# Altium PCB air.PcbDoc
Units mm, origin at the board's own origin, x right, y up, seen from the top; angles counter-clockwise.
Board outline 49.02 x 48.89 mm, 2 copper layers (Top Layer, Bottom Layer); 23 components, 26 nets, 115 pads, 28 vias.
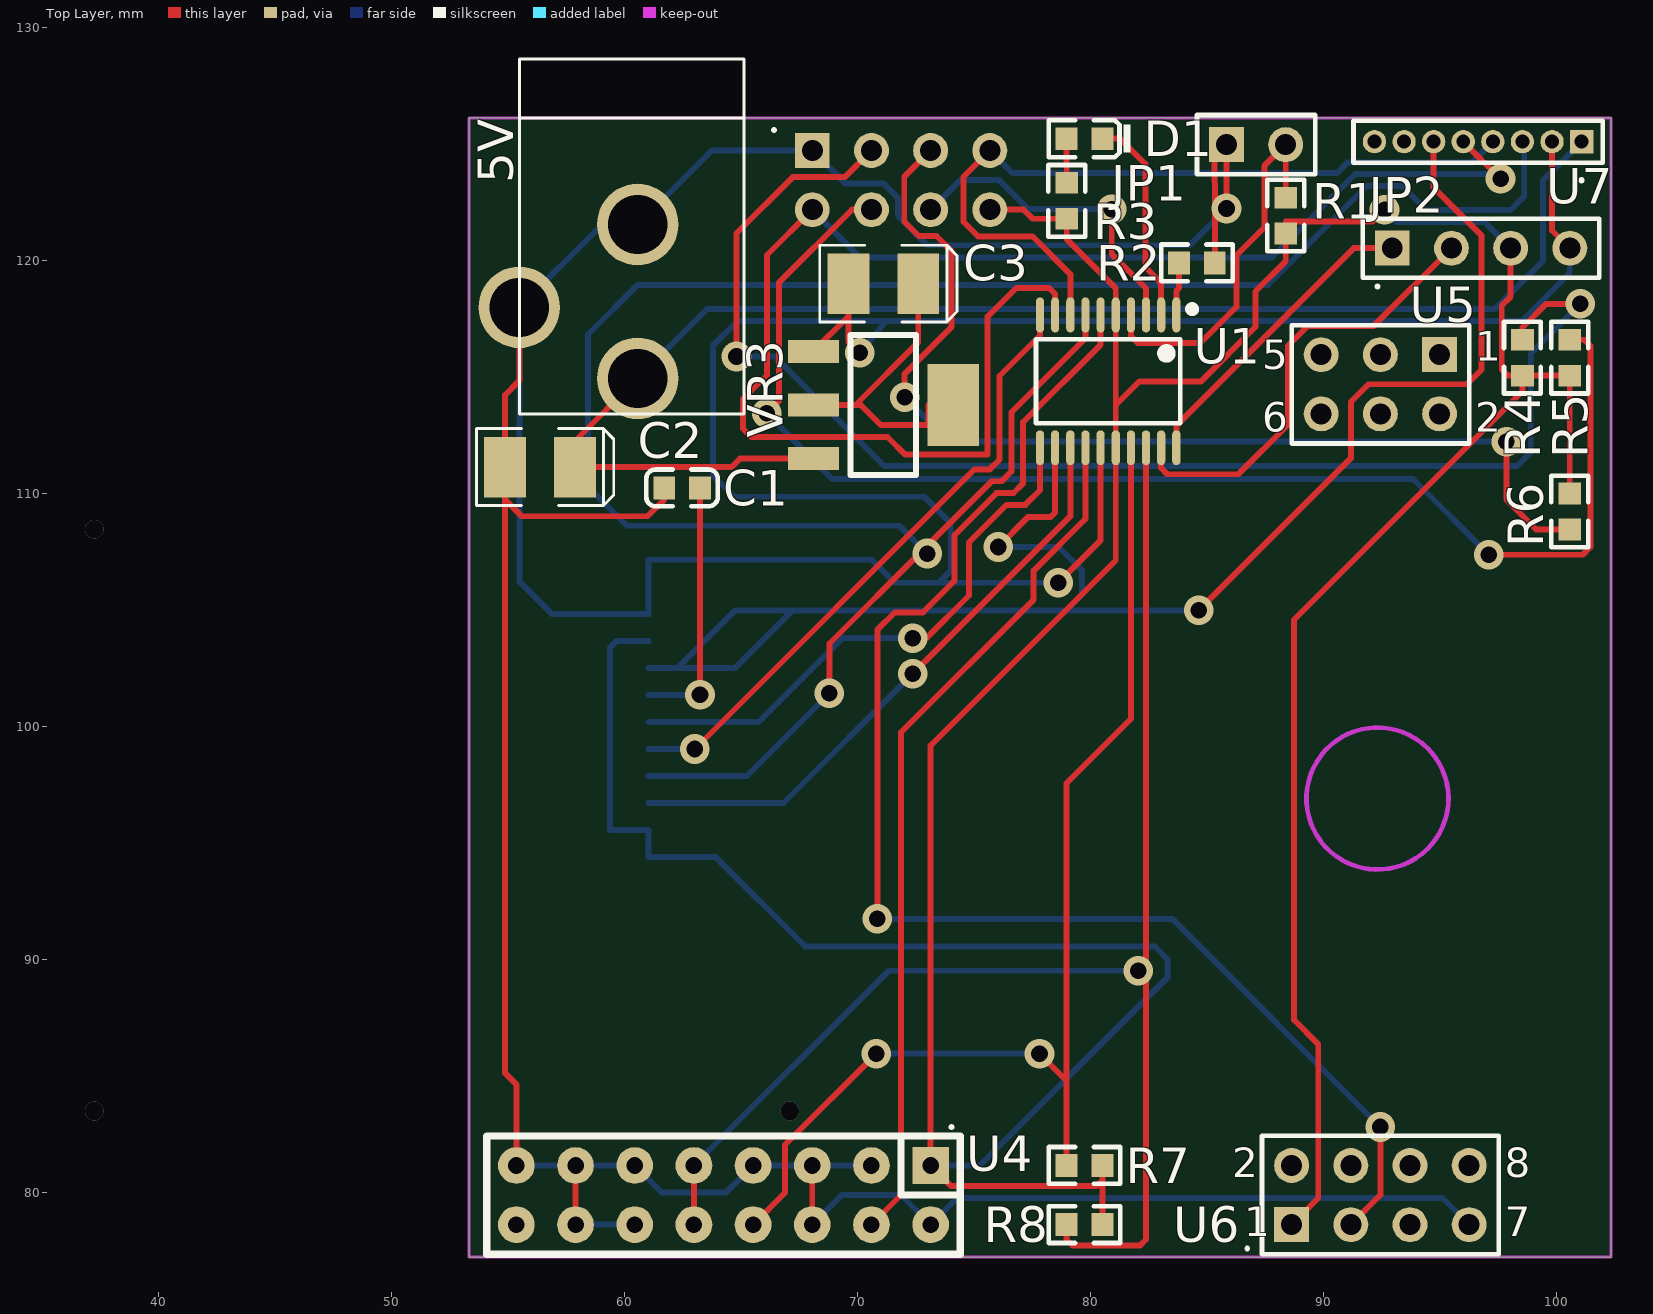
[diagram p0: Top Layer view]
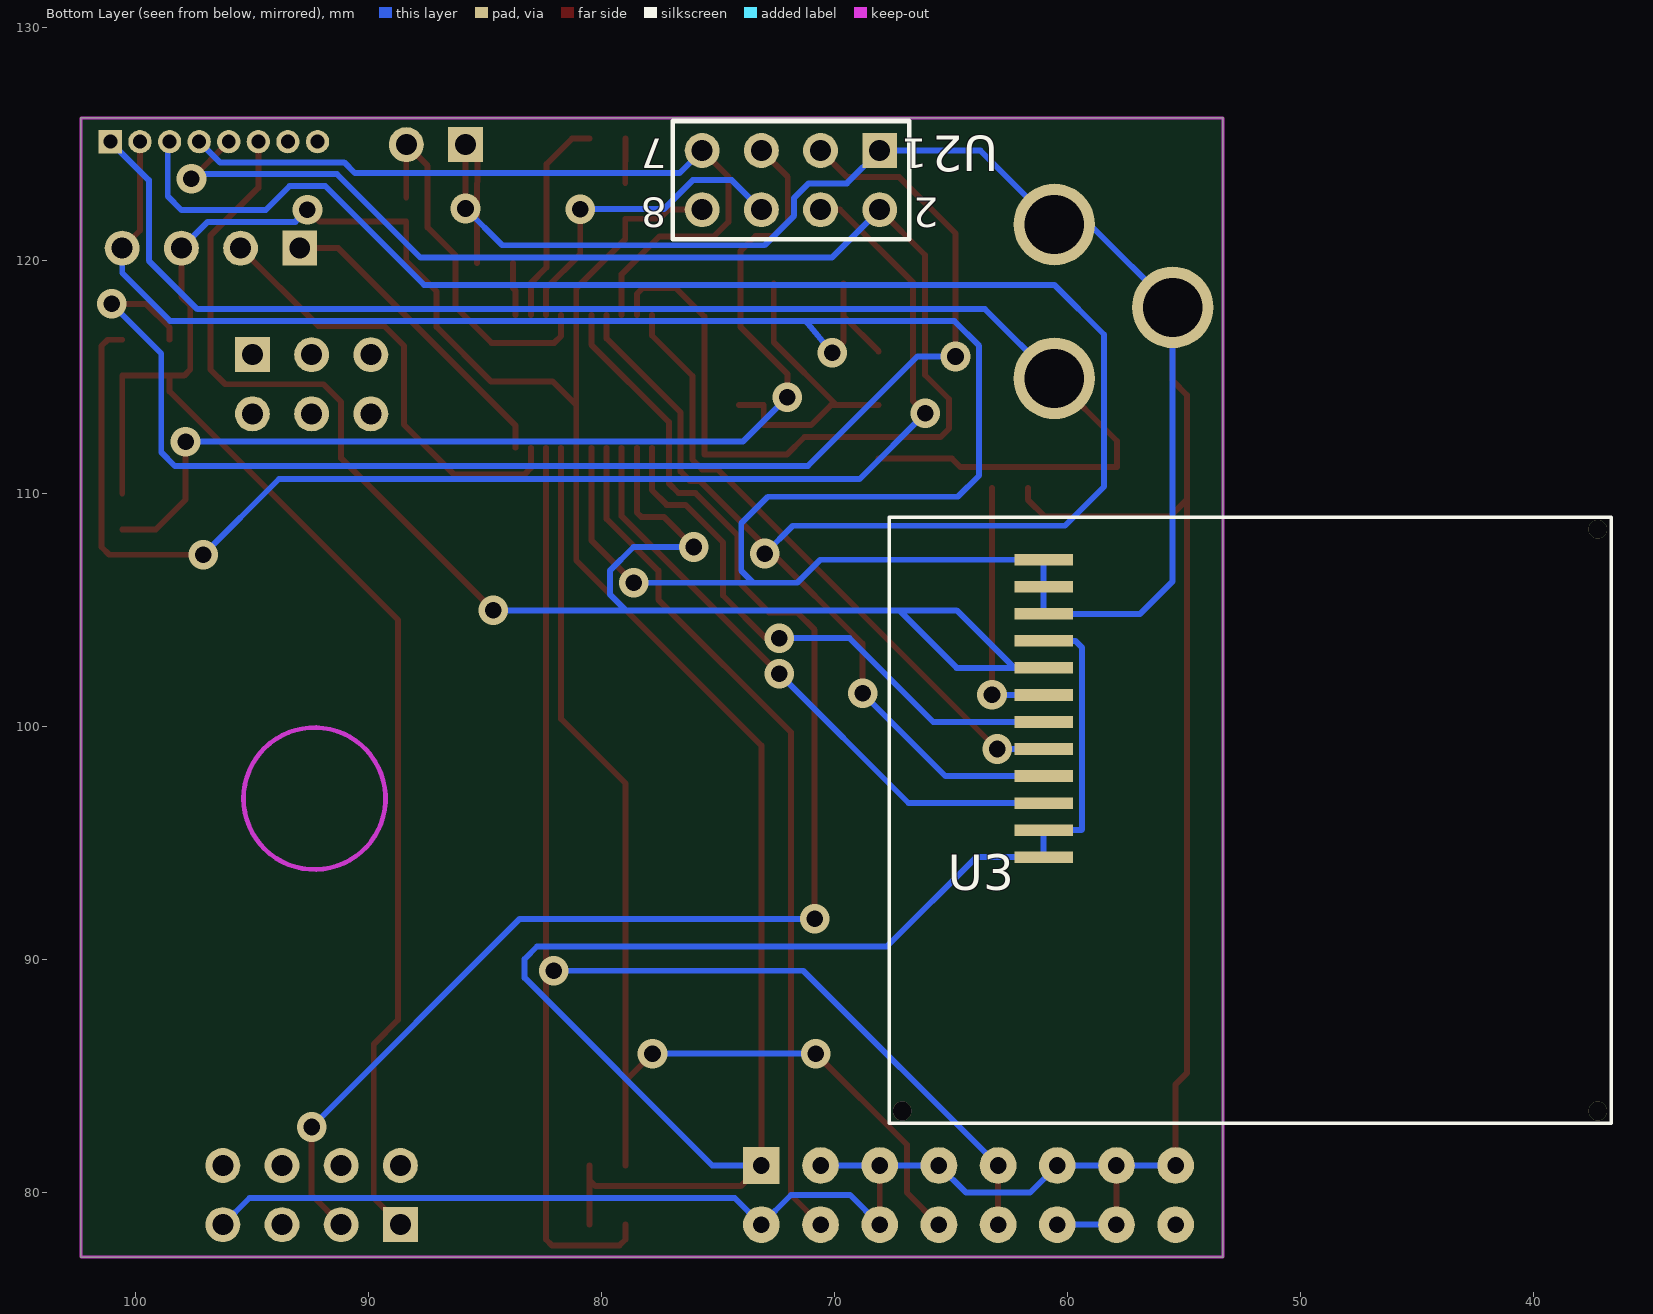
[diagram p1: Bottom Layer view, seen from below]

## Layer stack, top to bottom
Top Layer: signal copper 0.0356
Dielectric: dielectric 0.32, FR-4, Dk 4.8
Bottom Layer: signal copper 0.0356

## Board outline
53.34,77.216 53.34,126.111 102.362,126.111 102.362,77.216

## Design rules (kind name [scope] priority, off if disabled: settings)
Clearance [All] p1: gap=0.254
ComponentClearance [All] p1: gap=0.254 collisioncheckmode=3 verticalgap=0.254
PolygonConnect [All] p1: connectstyle=Relief reliefconductorwidth=0.254 reliefentries=4 polygonreliefangle="90 Angle"
RoutingVias [All] p1: holewidth=0.711 width=1.27 viastyle="Through Hole" minholewidth=0.711 minwidth=1.27 maxholewidth=0.711 maxwidth=1.27
SolderMaskExpansion [All] p1: expansion=0.102
TestPointUsage [All] p1: valid=0 allowmultiple=FALSE
Testpoint [All] p1: side=15 testpointundercomponent=TRUE minsize=1.016 maxsize=2.54 preferedsize=1.524 minholesize=0 maxholesize=1.016 preferedholesize=0.813 testpointgrid=0.025 style=1023 order=0-112345678
Width [All] p1: maxlimit=0.254 minlimit=0.254 preferedwidth=0.254
18 further rules are at their usual default settings.

## Classes and differential pairs
net class CPU[0..1]: CPU0 CPU1
net class LCD[0..1]: LCD0 LCD1
net class OTHER[0..1]: OTHER0 OTHER1
net class POWER[0..1]: POWER0 POWER1
net class SENSOR[0..1]: SENSOR0 SENSOR1
net class WIFI[0..1]: WIFI0 WIFI1

## Components (designator, comment, footprint, x,y, rotation, side; value= is the part's Value field where it differs from the comment)
5V "Header 3" POWER-B 60.579,118.491 r0 top locked (schematic designator POWER)
C1 "Cap Semi" LC-0603_C 62.484,110.236 r180 top locked
C2 "47u/16V" LC-CASE-B_3528 56.388,111.125 r0 top locked
C3 "10u" LC-CASE-B_3528 71.12,118.999 r0 top locked
D1 "LED" LC-0603_LED_S1 79.756,125.222 r180 top locked
JP1 "JUMPER" HDR1X2 85.852,124.968 r0 top locked
JP2 "ST-LINK V2" HDR1x4 92.964,120.523 r0 top locked
R1 "Res3" LC-0603_R 88.392,121.92 r270 top locked
R2 "Res3" LC-0603_R 84.582,119.888 r0 top locked
R3 "Res3" LC-0603_R 78.994,122.555 r270 top locked
R4 "Res3" LC-0603_R 98.552,115.824 r270 top locked
R5 "Res3" LC-0603_R 100.584,115.824 r270 top locked
R6 "Res3" LC-0603_R 100.584,109.22 r90 top locked
R7 "Res3" LC-0603_R 79.756,81.153 r0 top locked
R8 "Res3" LC-0603_R 79.756,78.613 r0 top locked
U1 "stm32f030f4p6" LC-TSSOP-20 80.772,114.808 r180 top locked
U2 "ESP8266" HDR2X4 68.072,124.714 r0 bottom locked
U3 "ST7585" ST7585 67.691,108.966 r270 bottom locked
U4 "LM096" IDC16 73.152,81.153 r180 top locked
U5 "RUISHI" HDR2X3 94.996,115.951 r180 top locked
U6 "RUISHI" HDR2X4 88.646,78.613 r0 top locked
U7 "PM2.5" MHDR1x8 101.092,125.095 r180 top locked
VR3 "AP1117E33L" LC-SOT-223 71.12,113.792 r180 top locked

## Footprints (in the part's own frame and the unit in brackets; to place one, negate y for a bottom-side part, rotate by r counter-clockwise, add the part's x,y. Pads: shape width x height; smd on the part's side, far side on the other; paste and mask are expansions set on the pad)
HDR1X2 [mm] "Connector; Header; 2 Position"
  rect 1.5x1.5 hole 0.9: 1(0,0)
  round 1.5 hole 0.9: 2(2.54,0)
  silkscreen extent -1.27,-1.27 3.81,1.27
HDR1x4 [mm] "Connector; Header; 4 Position"
  rect 1.5x1.5 hole 0.9: 1(0,0)
  round 1.5 hole 0.9: 2(2.54,0) 3(5.08,0) 4(7.62,0)
  silkscreen extent -1.27,-1.27 8.89,1.27
HDR2X3 [mm] "Connector; Header; 3x2 Position"
  rect 1.5x1.5 hole 0.9: 1(0,0)
  round 1.5 hole 0.9: 2(0,2.54) 3(2.54,0) 4(2.54,2.54) 5(5.08,0) 6(5.08,2.54)
  silkscreen extent -1.27,-1.27 6.35,3.81
HDR2X4 [mm] "Connector; Header; 4x2 Position"
  rect 1.5x1.5 hole 0.9: 1(0,0)
  round 1.5 hole 0.9: 2(0,2.54) 3(2.54,0) 4(2.54,2.54) 5(5.08,0) 6(5.08,2.54) 7(7.62,0) 8(7.62,2.54)
  silkscreen extent -1.27,-1.27 8.89,3.81
IDC16 [mil]
  rect 62x62 hole 28: 1(0,0)
  round 62 hole 28: 2(0,100) 3(100,0) 4(100,100) 5(200,0) 6(200,100) 7(300,0) 8(300,100) 9(400,0) 10(400,100) 11(500,0) 12(500,100) 13(600,0) 14(600,100) 15(700,0) 16(700,100)
  silkscreen extent -50,-50 750,150
LC-0603_C [mm]
  rect 0.93x0.98 smd: 1(-0.77,0) 2(0.77,0)
  silkscreen extent -1.54,-0.79 1.54,0.79, body extent -0.8,-0.4 0.8,0.4, height 0.3
LC-0603_LED_S1 [mm]
  rect 0.93x0.98 smd: A(0.77,0) K(-0.77,0)
  silkscreen extent -1.98,-0.79 1.54,0.79, body extent -0.8,-0.4 0.8,0.4, height 0.6
LC-0603_R [mm]
  rect 0.93x0.98 smd: 1(-0.77,0) 2(0.77,0)
  silkscreen extent -1.54,-0.79 1.54,0.79, body extent -0.85,-0.4 0.85,0.4, height 0.56
LC-CASE-B_3528 [mm]
  rect 1.8x2.6 smd: 1(1.5,0) 2(-1.5,0)
  silkscreen extent -2.73,-1.65 3.16,1.65, body extent -1.85,-1.47 1.85,1.46, height 2.03
LC-SOT-223 [mm]
  rect 2.2x1 smd: 1(3,-2.3) 2(3,0) 3(3,2.3)
  rect 2.2x3.5 smd: 2(-3,0)
  silkscreen extent -1.4,-3 1.4,3, body extent -3.49,-3.24 3.49,3.24, height 1.64
LC-TSSOP-20 [mm]
  oval 0.35x1.5 smd: 1(-2.925,-2.85) 2(-2.275,-2.85) 3(-1.625,-2.85) 4(-0.975,-2.85) 5(-0.325,-2.85) 6(0.325,-2.85) 7(0.975,-2.85) 8(1.625,-2.85) 9(2.275,-2.85) 10(2.925,-2.85) 11(2.925,2.85) 12(2.275,2.85) 13(1.625,2.85) 14(0.975,2.85) 15(0.325,2.85) 16(-0.325,2.85) 17(-0.975,2.85) 18(-1.625,2.85) 19(-2.275,2.85) 20(-2.925,2.85)
  silkscreen extent -3.75,-3.25 3.1,1.8
MHDR1x8 [mm] "Connector; Header; 8 Position"
  rect 1x1 hole 0.6: 1(0,0)
  round 1 hole 0.6: 2(1.27,0) 3(2.54,0) 4(3.81,0) 5(5.08,0) 6(6.35,0) 7(7.62,0) 8(8.89,0)
  silkscreen extent -0.9,-0.9 9.79,0.9
POWER-B [mm]
  round 3.5 hole 2.54: 1(0,-3.556) 2(0,3.048) 3(-5.08,-0.508)
  silkscreen extent -5.08,-5.08 4.57,10.16
ST7585 [mm] "96X48 LCD"
  rect 0.5x2.5 smd: 1(14.58,6.655) 2(13.419,6.655) 3(12.259,6.655) 4(11.099,6.655) 5(9.939,6.655) 6(8.779,6.655) 7(7.618,6.655) 8(6.458,6.655) 9(5.298,6.655) 10(4.138,6.655) 11(2.977,6.655) 12(1.817,6.655)
  silkscreen extent 0,0.03 26.01,31.01

## Part data
5V: "Header, 3-Pin"
C1: "Capacitor (Semiconductor SIM Model)"
C2 C3: library part ELECTRO2
JP1: "Jumper"
JP2: library part "4 HEADER", "4 Pin Header"
R1 R2 R3 R4 R5 R6 R7 R8: "Resistor"
U2: library part "Header 4X2", "Header, 4-Pin, Dual row"
U4: library part 16PIN
U5: library part "Header 33", "Header, 6-Pin"
U6: library part "Header 44", "Header, 8-Pin"
U7: library part 8PIN, "Connector"
VR3: library part "Volt Reg", "Voltage Regulator"

## Via types
v1: diameter 1.27, hole 0.711, Top Layer to Bottom Layer, 25 vias
v2: diameter 0.8, hole 0.8, Top Layer to Bottom Layer, 3 vias

## Nets (pads, with @x,y where several pads share a name; then routed paths per layer and width w, separated by ;. In a path a pad name is that pad's centre, name@x,y a point inside that pad or via, vN(x,y) a via of type N, cw(c..) or ccw(c..) an arc to the next point about the centre after c; other vN are vias at no path point)
3.3V: C3.1 VR3.2 | length 13.5
  Top Layer w0.254: VR3.2@68.12,113.792 69.926,113.792 ; C3.1 72.62,116.486 69.926,113.792 ; VR3.2@74.12,113.792 73.05,113.792 73.05,112.928 71.018,112.928 70.155,113.792 69.926,113.792
3V3: JP2.3 R1.2 R3.2 R4.2 R5.2 R6.2 R7.2 R8.2 U1.5 U1.16 U2.8 U3.1 U3.2 U3.9 U4.1 U6.1 | length 187.3
  Top Layer w0.254: U2.8 77.14,122.174 77.529,121.785 R3.2 78.994,120.899 81.097,118.796 U1.5 81.097,113.792 ; R8.2 80.526,80.518 ; R7.2 80.526,80.518 ; U6.1 89.789,79.756 89.789,86.36 88.748,87.401 88.748,104.572 98.552,114.376 R4.2 ; v1(92.634,122.174) 92.126,121.666 88.392,121.666 R1.2 88.392,119.964 87.097,118.669 87.097,117.145 84.76,114.808 82.113,114.808 81.097,113.792 ; JP2.3 98.044,118.44 97.663,118.059 97.663,115.316 97.925,115.054 R4.2 ; R6.2 R5.2 R4.2 ; 80.526,80.518 80.272,80.264 74.041,80.264 U4.1 73.152,99.177 81.097,107.122 U1.16 81.097,113.792
  Bottom Layer w0.254: U3.9 59.675,103.668 59.385,103.378 59.385,95.572 59.411,95.547 U3.2 U3.1 63.932,94.386 67.767,90.551 82.779,90.551 83.312,90.018 83.312,89.205 75.26,81.153 U4.1 ; v1(92.634,122.174) 93.154,121.654 96.913,121.654 JP2.3
5V: 5V.1 C2.1 U7.1 VR3.3 | length 62.1
  Top Layer w0.254: 5V.1 57.888,112.244 C2.1 64.607,111.125 64.974,111.492 VR3.3
  Bottom Layer w0.254: 5V.1 63.551,117.907 97.358,117.907 99.441,119.99 99.441,123.444 U7.1
ADC_IN0: U1.6 U6.3 | length 61
  Top Layer w0.254: v1(70.866,91.736) 70.866,104.14 71.62,104.894 72.825,104.894 74.175,106.244 74.175,108.203 75.984,110.012 76.708,110.012 77.125,110.429 77.125,113.061 80.447,116.383 U1.6 ; U6.3 92.456,79.883 v1(92.456,82.804)
  Bottom Layer w0.254: v1(70.866,91.736) 83.524,91.736 v1(92.456,82.804)
BOOT0: R2.1 U1.1 | length 2.3
  Top Layer w0.254: U1.1 83.697,118.694 83.812,118.809 R2.1
CH_PD: R5.1 U2.4 | length 58.7
  Top Layer w0.254: v1(66.116,113.436) 66.639,113.959 66.639,119.039 69.774,122.174 U2.4 ; v1(97.104,107.366) 101.143,107.366 101.473,107.696 101.473,116.332 101.211,116.594 R5.1
  Bottom Layer w0.254: v1(66.116,113.436) 68.936,110.617 93.853,110.617 v1(97.104,107.366)
GND: 5V.2 5V.3 C1.2 C2.2 C3.2 JP1.1 JP2.4 R2.2 U1.15 U2.1 U3.10 U3.11 U3.12 U4.2 U4.3 U4.5 U4.6 U4.7 U4.11 U4.12 U4.13 U4.14 U4.15 U6.7 U7.2 VR3.1 | length 258.4
  Top Layer w0.254: U4.15 55.372,84.633 54.888,85.117 54.888,109.728 ; 5V.3 55.499,114.835 54.888,114.224 C2.2 54.888,109.728 ; U4.14 U4.13 ; C1.2 61.714,109.728 61.003,109.017 55.599,109.017 54.888,109.728 ; U4.6 U4.5 ; VR3.1 69.62,117.592 ; C3.2 69.62,117.592 ; v1(70.104,116.027) 69.62,116.511 69.62,117.592 ; v1(78.623,106.164) 80.447,107.988 U1.15 ; R2.2 85.352,121.048 85.349,122.224 85.344,124.46 JP1.1 v1(85.852,122.225) ; U7.2 99.822,121.285 JP2.4
  Bottom Layer w0.254: U4.15 U4.13 U4.11 61.62,79.985 64.364,79.985 U4.7 U4.5 U4.3 ; U4.14 U4.12 ; U4.6 69.342,79.883 71.882,79.883 U4.2 74.295,79.756 95.123,79.756 U6.7 ; v1(70.104,116.027) 71.247,117.399 ; v1(78.623,106.164) 73.5,106.164 ; v1(85.852,122.225) 84.277,120.65 73.013,120.65 71.743,121.92 71.743,122.682 71.12,123.305 69.481,123.305 U2.1 63.754,124.714 5V.2 59.055,121.539 5V.3 55.499,106.225 56.896,104.828 U3.10 U3.11 U3.12 70.626,107.149 71.61,106.164 73.5,106.164 ; JP2.4 100.584,119.456 98.527,117.399 71.247,117.399 ; 71.247,117.399 64.872,117.399 63.805,116.332 63.805,110.769 64.719,109.855 72.873,109.855 74.016,108.712 74.016,106.68 73.5,106.164
GPIO0: R6.1 U2.5 | length 45.5
  Top Layer w0.254: v1(72.034,114.129) 72.034,115.131 74.053,117.15 74.053,120.396 73.406,121.043 72.644,121.043 72.021,121.666 72.021,123.583 U2.5 ; v1(97.866,112.217) 97.866,109.728 99.144,108.45 R6.1
  Bottom Layer w0.254: v1(72.034,114.129) 73.947,112.217 v1(97.866,112.217)
GPIO2: R4.1 U2.3 | length 59.5
  Top Layer w0.254: v1(64.821,115.875) 64.821,121.158 67.234,123.571 69.469,123.571 U2.3 ; R4.1 98.552,117.119 99.568,118.135 v1(101.041,118.135)
  Bottom Layer w0.254: v1(64.821,115.875) 66.456,115.875 71.155,111.176 98.323,111.176 98.908,111.76 98.908,116.002 v1(101.041,118.135)
I2C1_SCL: R7.1 U1.17 U4.8 | length 50.1
  Top Layer w0.254: U4.8 66.904,79.985 66.904,82.042 v1(70.815,85.954) ; v1(77.826,85.954) 78.986,84.793 ; R7.1 78.986,84.793 ; U1.17 81.747,100.314 78.986,97.553 78.986,84.793
  Bottom Layer w0.254: v1(70.815,85.954) v1(77.826,85.954)
I2C1_SDA: R8.1 U1.18 U4.9 U4.10 | length 63.8
  Top Layer w0.254: U4.10 U4.9 ; R8.1 78.986,77.978 79.24,77.724 82.143,77.724 82.397,77.978 82.397,89.51 v1@82.397,89.839 ; v1(82.067,89.51) v1@82.397,89.839 ; U1.18 v1@82.397,89.839
  Bottom Layer w0.254: U4.9 71.349,89.51 v1(82.067,89.51)
NetC1_1: C1.1 U3.7 | length 11.1
  Top Layer w0.254: v1(63.254,101.348) C1.1
  Bottom Layer w0.254: U3.7 v1(63.254,101.348)
NetD1_A: D1.A R3.1 | length 1.9
  Top Layer w0.254: D1.A 78.986,124.265 78.994,124.257 R3.1
NRST: JP1.2 R1.1 U1.4 | length 16.3
  Top Layer w0.254: U1.4 81.747,116.754 82.042,116.459 84.732,116.459 86.279,118.006 86.279,120.213 87.478,121.412 87.478,124.054 JP1.2 R1.1
PA1: U1.7 U3.4 U7.3 | length 98.4
  Top Layer w0.254: v1(68.809,101.422) 68.809,102.641 68.809,103.555 72.835,107.581 75.774,110.52 76.2,110.52 76.617,110.937 76.617,113.472 79.797,116.652 U1.7
  Bottom Layer w0.254: U3.4 64.034,97.867 65.253,97.867 v1(68.809,101.422) ; v1(73,107.417) 71.806,108.61 60.122,108.61 58.445,110.287 58.445,116.815 60.579,118.948 87.63,118.948 91.872,123.19 93.396,123.19 94.424,122.162 98.044,122.162 98.628,122.746 98.628,125.019 U7.3
PA6: U1.12 U3.8 U7.6 | length 70.9
  Top Layer w0.254: v1(76.048,107.696) 77.343,108.991 78.308,108.991 78.497,109.18 U1.12 ; v1(84.658,104.978) 91.186,111.506 91.186,113.919 91.948,114.681 96.164,114.681 96.799,115.316 96.799,121.056 94.742,123.114 U7.6
  Bottom Layer w0.254: U3.8 62.3,102.508 ; v1(76.048,107.696) 78.638,107.696 79.654,106.68 79.654,105.664 78.969,104.978 ; v1(84.658,104.978) 78.969,104.978 ; 62.3,102.508 64.77,102.508 67.24,104.978 ; 62.3,102.508 64.77,104.978 67.24,104.978 ; 67.24,104.978 78.969,104.978
PB1: U1.14 U4.4 | length 37.1
  Top Layer w0.254: U4.4 71.882,79.883 71.882,99.746 77.572,105.435 77.572,106.68 79.797,108.905 U1.14
PF0: D1.K U1.2 | length 9
  Top Layer w0.254: D1.K 81.28,125.222 82.372,124.13 82.372,119.699 83.047,119.024 U1.2
PF1: U1.3 U2.6 | length 14
  Top Layer w0.254: v1(80.924,122.199) 80.924,120.268 82.397,118.796 U1.3
  Bottom Layer w0.254: U2.6 74.422,123.444 76.098,123.444 77.343,122.199 v1(80.924,122.199)
SPI1_MOSI: U1.13 U3.3 | length 26.2
  Top Layer w0.254: v1(72.39,102.26) 79.147,109.017 U1.13
  Bottom Layer w0.254: U3.3 66.836,96.707 v1(72.39,102.26)
SPI1_NSS: U1.10 U3.5 | length 27.1
  Top Layer w0.254: v1(63.035,99.027) 75.037,111.028 75.692,111.028 76.109,111.445 76.109,115.036 77.847,116.774 U1.10
  Bottom Layer w0.254: U3.5 v1(63.035,99.027)
SPI1_SCK: U1.11 U3.6 | length 24.1
  Top Layer w0.254: v1(72.39,103.784) 72.967,103.784 74.801,105.618 74.801,107.897 76.408,109.504 77.216,109.504 77.847,110.135 U1.11
  Bottom Layer w0.254: U3.6 65.776,100.187 69.373,103.784 v1(72.39,103.784)
SWCLK: JP2.1 U1.20 | length 13.4
  Top Layer w0.254: U1.20 83.697,112.907 91.313,120.523 JP2.1
SWDIO: JP2.2 U1.19 | length 19.4
  Top Layer w0.254: U1.19 83.047,111.085 83.312,110.82 86.36,110.82 88.488,112.949 88.488,116.332 89.347,117.19 92.171,117.19 JP2.2
USART1_RX: U1.9 U2.2 U7.5 | length 66.2
  Top Layer w0.254: U2.2 66.131,120.233 66.131,115.077 65.1,114.046 65.1,112.776 65.456,112.42 71.298,112.42 72.057,111.661 75.601,111.661 75.601,117.587 76.835,118.821 78.232,118.821 78.497,118.556 U1.9 ; U7.5 v1(97.612,123.495)
  Bottom Layer w0.254: U2.2 70.129,120.117 87.782,120.117 91.364,123.698 97.409,123.698 v1(97.612,123.495)
USART1_TX: U1.8 U2.7 U7.4 | length 33.3
  Top Layer w0.254: U2.7 74.561,123.583 74.561,121.654 75.184,121.031 77.521,121.031 79.147,119.405 U1.8
  Bottom Layer w0.254: U2.7 76.657,123.749 90.602,123.749 91.059,124.206 96.393,124.206 U7.4
pads on no net: U4.16 U5.1 U5.2 U5.3 U5.4 U5.5 U5.6 U6.2 U6.4 U6.5 U6.6 U6.8 U7.7 U7.8
copper on no net:
  other v2: 37.262,83.49 67.107,83.49 37.262,108.458

## Keep-outs
Keep-Out Layer:
  circle w0.2: c92.329,96.901 r3.048
  lines w0.127: 53.34,77.216 102.362,77.216 102.362,126.111 53.34,126.111 53.34,77.216

## Silkscreen, mask and mechanical layers (free items; w line width, h text height)
Top Overlay:
  lines w0.254: 66.421,125.592 ccw(c64.643,125.592) 66.421,125.603 ; 74.041,82.793 ccw(c72.263,82.793) 74.041,82.804 ; 86.741,77.586 ccw(c84.963,77.586) 86.741,77.597 ; 92.329,118.872 ccw(c90.551,118.872) 92.329,118.883 ; 101.092,123.433 ccw(c99.314,123.433) 101.092,123.444

## Text inside footprints (layer, text, board x,y; h text height)
U2: Bottom Overlay "2" at 65.532,122.682 h1.27 r180; Bottom Overlay "1" at 66.04,125.222 h1.27 r180; Bottom Overlay "7" at 77.216,125.222 h1.27 r180; Bottom Overlay "8" at 77.216,122.682 h1.27 r180
U5: Top Overlay "6" at 87.376,112.649 h1.27; Top Overlay "5" at 87.376,115.316 h1.27; Top Overlay "2" at 96.52,112.649 h1.27; Top Overlay "1" at 96.52,115.697 h1.27
U6: Top Overlay "2" at 86.106,80.645 h1.27; Top Overlay "1" at 86.614,78.105 h1.27; Top Overlay "7" at 97.79,78.105 h1.27; Top Overlay "8" at 97.79,80.645 h1.27